# EAGLE board humidity_sensor (EAGLE 9.5.1)
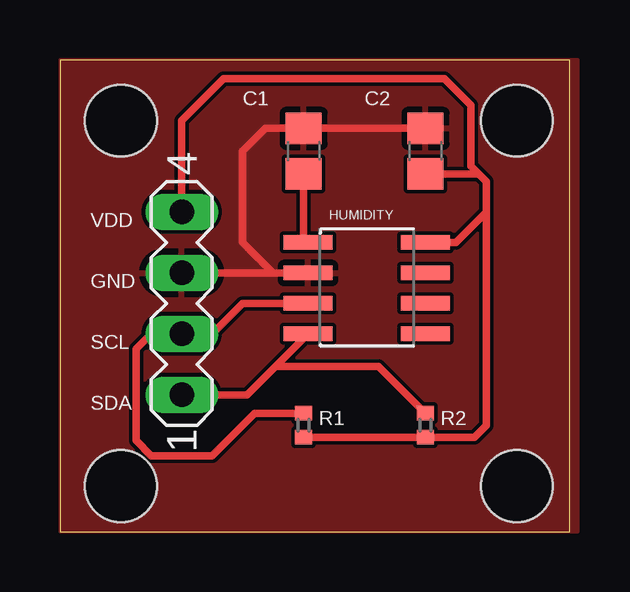
[diagram p0: board, top side]

Size 21.26 x 19.67 mm. Coordinates in mm from the lower left corner, seen from the top.
Outline: 0,19.67 0,0 21.26,0 21.26,19.67 0,19.67
Copper layers (1*16): Top 0.035mm / dielectric 1.5mm / Bottom 0.035mm
Design rules "default *": minimum track width 6mil, minimum drill 0.35mm, track to track 6mil, track to pad 6mil, pad to pad 6mil, via to via 6mil, smd to smd 6mil, copper to edge 0mil, drill to drill 6mil, minimum pad ring 10mil, minimum via ring 8mil, stop-mask expansion 4mil, vias tented up to drill 0mil, thermal gap 10mil
Holes 3 mm at 2.54,17.14 19.05,1.9 19.05,17.14 2.54,1.9

## Footprints (pad centres in the part's own frame; a part is rotated, then mirrored left to right if it is on the bottom)
C0805 = smd 1.3 x 1.5: 1 -0.95,0; 2 0.95,0
HIH6030-021-001 = smd 0.61 x 2.03: 1 0,-4.9; 2 1.27,-4.9; 3 2.54,-4.9; 4 3.81,-4.9; 5 3.81,0; 6 2.54,0; 7 1.27,0; 8 0,0
R0402 = smd 0.6 x 0.7: 1 -0.5,0; 2 0.5,0
MA04-1 = drill 1.016 long: 1 -3.81,0; 2 -1.27,0; 3 1.27,0; 4 3.81,0

## Placement (x,y rotation side)
C1  0.1µF  [C0805]  10.16,15.87 90 top
C2  0.22µF  [C0805]  15.24,15.87 90 top
HUMIDITY  [HIH6030-021-001]  15.24,12.06 270 top
R1  2.2k  [R0402]  10.16,4.44 270 top
R2  2.2k  [R0402]  15.24,4.44 270 top
SV1  [MA04-1]  5.08,9.52 90 top

## Library data of the parts
C1 C2 = rcl; SPICEPREFIX: C
HUMIDITY = HIH6030-021-001
R1 R2 = rcl; SPICEPREFIX: R
SV1 = con-lstb; OC_FARNELL: unknown; OC_NEWARK: unknown

## Nets
GND: C1.2 C2.2 HUMIDITY.2 SV1.3
SCL: HUMIDITY.3 R1.1 SV1.2
SDA: HUMIDITY.4 R2.1 SV1.1
VCORE: C1.1 HUMIDITY.1
VDD: C2.1 HUMIDITY.8 R1.2 R2.2 SV1.4

## Tracks (layer width: path | path; a pad name or v marks a point on that pad's centre or on a via)
GND
  Top 0.305: SV1.3 8.89,10.79 | 8.89,10.79 HUMIDITY.2 | C2.2 10.23,16.82 10.16,16.76 C1.2 8.57,16.82 7.62,15.87 7.62,12.06 8.89,10.79
  pour Top: 0,0 0,19.68 21.59,19.68 21.59,0
SCL
  Top 0.305: HUMIDITY.3 7.62,9.52 6.35,8.25 SV1.2 3.81,8.25 3.17,7.62 3.17,3.81 3.81,3.17 6.35,3.17 8.12,4.94 R1.1
SDA
  Top 0.305: HUMIDITY.4 8.98,6.89 | 8.98,6.89 7.8,5.71 SV1.1 | R2.1 13.29,6.89 8.98,6.89
VCORE
  Top 0.305: 10.16,12.06 HUMIDITY.1 10.16,12.24 C1.1
VDD
  Top 0.305: R1.2 R2.2 17.28,3.94 17.78,4.44 17.78,13.33 | 17.78,13.33 17.78,14.6 17.46,14.92 | 17.46,14.92 C2.1 | 17.78,13.33 16.51,12.06 HUMIDITY.8 | SV1.4 5.08,17.14 6.82,18.89 16.04,18.89 17.14,17.78 17.14,15.24 17.46,14.92

## Text on the board
tNames: VDD | GND | SCL | SDA